# Allegro board 808bd13.brd
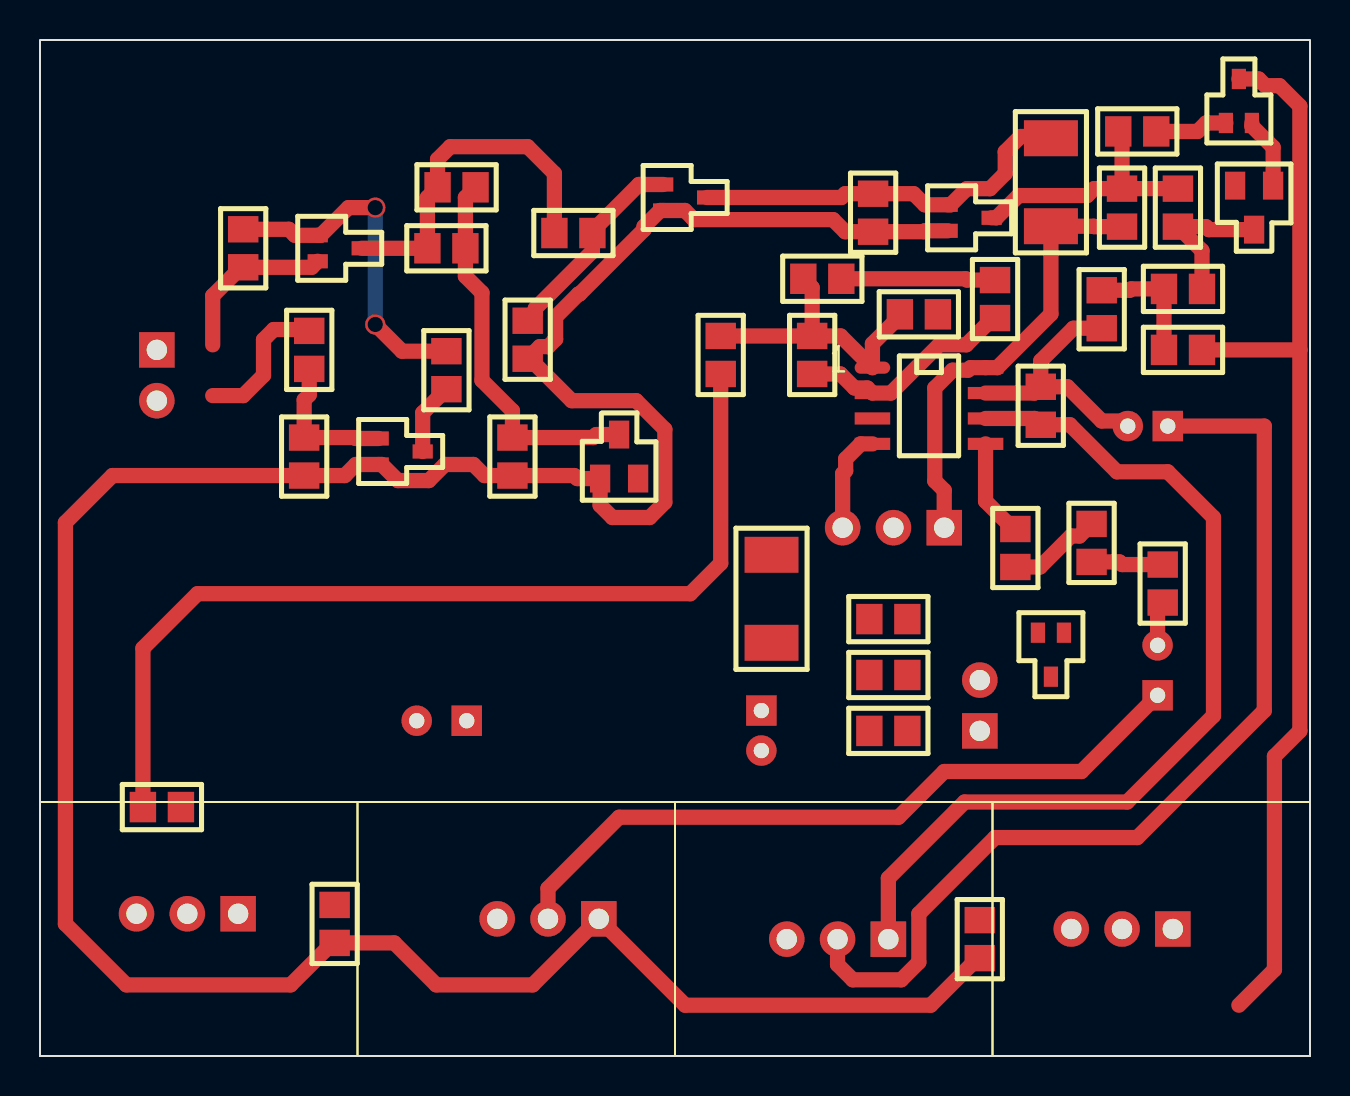
[diagram p0: board, top side]
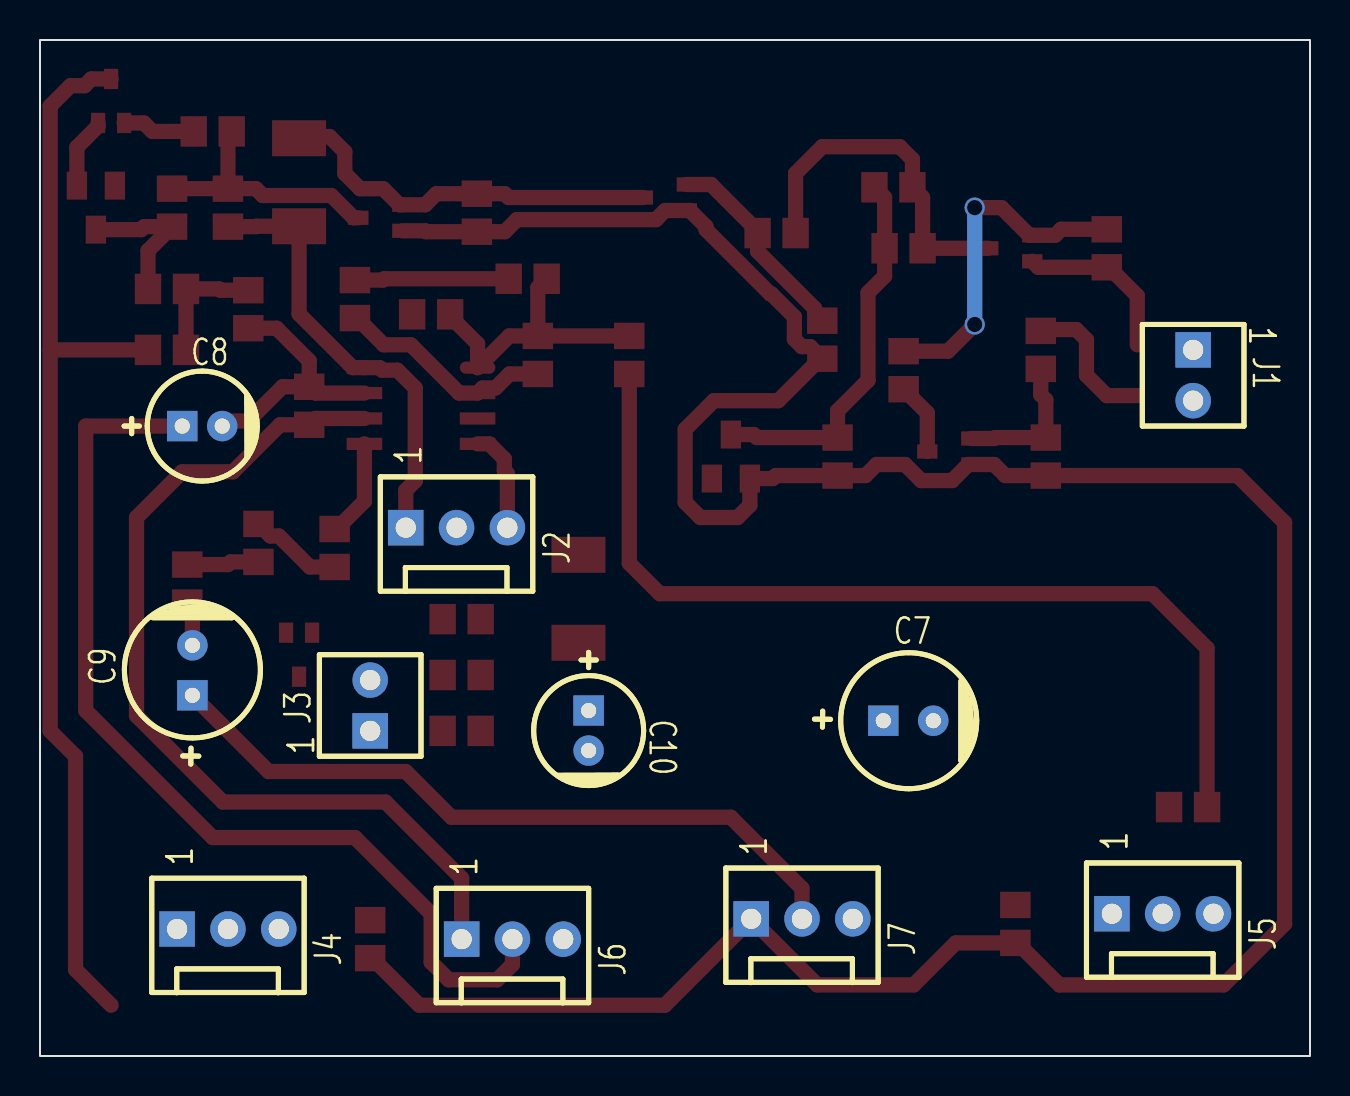
[diagram p1: board, bottom side, seen from below]

Outline 63.5 x 50.8 mm; copper layers: TOP, BOTTOM. Coordinates in mm from the lower left corner of the outline.
Outline path: rectangle 0,0 63.5,50.8

## Placement (name value [footprint] x y rotation side)
C1  0.015UF  [CAPC-0805_W]  20.83 43.43 0 top
C2  0.1UF  [CAPC-0805_W]  41.66 42.16 270 top
C3  0.033UF  [CAPC-0805_W]  56.9 42.42 270 top
C4  0.015UF  [CAPC-0805_W]  47.75 37.85 90 top
C5  0.015UF  [CAPC-0805_W]  39.12 38.86 180 top
C6  0.1UF  [CAPC-0805_W]  14.73 6.6 270 top
C7  47UF  [CAPE_2P5_6P3X11P5]  21.34 16.76 180 bottom
C8  33UF  [CAPE_2P0_5X11P5]  56.39 31.5 180 bottom
C9  47UF  [CAPE_2P5_6P3X11P5]  55.88 18.03 90 bottom
C10  1.0UF  [CAPE_2P0_5X11P5]  36.07 17.27 270 bottom
C11  220PF  [CAPC-0805_W]  42.42 21.84 0 top
D1  MMBD4148  [SOT-23_W]  28.96 29.97 90 top
D2  MMBD4148  [SOT-23_W]  60.71 42.42 270 top
J1  640452-2  [CONN-AMP-2PIN-100MIL-ST]  5.84 35.31 270 bottom
J2  640456-3  [CONN-AMP-3PIN-100MIL-ST]  45.21 26.42 180 bottom
J3  640452-2  [CONN-AMP-2PIN-100MIL-ST]  46.99 16.26 90 bottom
J4  641215-3  [CONN-AMP-3PIN-100MIL-ST]  56.64 6.35 180 bottom
J5  641215-3  [CONN-AMP-3PIN-100MIL-ST]  9.91 7.11 180 bottom
J6  641215-3  [CONN-AMP-3PIN-100MIL-ST]  42.42 5.84 180 bottom
J7  641215-3  [CONN-AMP-3PIN-100MIL-ST]  27.94 6.86 180 bottom
Q1  FJX945  [SOT-323_W]  18.03 30.23 0 top
Q2  FJX733  [SOT-323_W]  14.99 40.39 0 top
Q3  FJX945  [SOT-323_W]  32.26 42.93 0 top
Q4  FJX945  [SOT-323_W]  46.48 41.91 0 top
Q5  FJX945  [SOT-323_W]  59.94 47.75 90 top
Q6  FJX945  [SOT-323_W]  50.55 20.07 270 top
R1  22K  [RESC-0805_W]  13.46 35.31 90 top
R2  10K  [RESC-0805_W]  13.21 29.97 90 top
R3  4.7K  [RESC-0805_W]  10.16 40.39 270 top
R4  10K  [RESC-0805_W]  20.32 34.29 90 top
R5  100K  [RESC-0805_W]  20.32 40.39 0 top
R6  8.2K  [RESC-0805_W]  26.67 41.15 0 top
R7  2.7K  [RESC-0805_W]  24.38 35.81 90 top
R8  4.7K  [RESC-0805_W]  23.62 29.97 90 top
R9  1.0M  [RESC-2010_W]  50.55 43.69 270 top
R10  22K  [RESC-0805_W]  54.1 42.42 270 top
R11  100K  [RESC-0805_W]  54.86 46.23 0 top
R12  1.0M  [RESC-0805_W]  57.15 38.35 0 top
R13  6.8K  [RESC-0805_W]  57.15 35.31 180 top
R14  1.0M  [RESC-0805_W]  38.61 35.05 270 top
R16  22K  [RESC-0805_W]  46.99 5.84 90 top
R17  470K  [RESC-0805_W]  53.09 37.34 270 top
R18  10K  [RESC-0805_W]  6.1 12.45 180 top
R19  220  [RESC-0805_W]  34.04 35.05 90 top
R20  47K  [RESC-0805_W]  43.94 37.08 0 top
R22  22K  [RESC-0805_W]  48.77 25.4 90 top
R25  47K  [RESC-0805_W]  50.04 32.51 90 top
R26  82K  [RESC-0805_W]  56.13 23.62 90 top
R27  100K  [RESC-0805_W]  52.58 25.65 270 top
R28  100K  [RESC-0805_W]  42.42 19.05 180 top
R29  6.8K  [RESC-2010_W]  36.58 22.86 270 top
R30  1.0K  [RESC-0805_W]  42.42 16.26 0 top
U1  LM258D  [SO8]  44.45 32.51 0 top

## Library data of the parts
C1 C4 C5 = C_SMT_X7R_0805: alternate symbols: (CAPC-0805_W_PADS,CAPC-0805_HD); part number: C_SMT_X7R_0805-10000435,0.015UF,X7R,25V,5%,CAPC-0805_W
C2 C6 = C_SMT_X7R_0805: alternate symbols: (CAPC-0805_W_PADS,CAPC-0805_HD); part number: C_SMT_X7R_0805-10000445,0.1UF,X7R,25V,5%,CAPC-0805_W
C3 = C_SMT_X7R_0805: alternate symbols: (CAPC-0805_W_PADS,CAPC-0805_HD); part number: C_SMT_X7R_0805-10000439,0.033UF,X7R,25V,5%,CAPC-0805_W
C7 C9 = C_TH_LYTIC85_2P5_6P3X11P5: alternate symbols: (CAPE_5P0_6P3X11P5); part number: C_TH_LYTIC85_2P5_6P3X11P5-10002982,47UF,RADIAL,50VDC,20%,85C,CAPE_2P5_6P3X11P5
C8 = C_TH_LYTIC85_2P0_5X11P5: alternate symbols: (CAPE_5P0_5X11P5,CAPER_5X11_2_PADS,CAPE_2P5_5X11,CAPEL_2P0_5X11P5,CAPER_2P0_5X11P5); part number: C_TH_LYTIC85_2P0_5X11P5-10002898,33UF,RADIAL,6.3VDC,20%,85C,CAPE_2P0_5X11P5
C10 = C_TH_LYTIC85_2P0_5X11P5: alternate symbols: (CAPE_5P0_5X11P5,CAPER_5X11_2_PADS,CAPE_2P5_5X11,CAPEL_2P0_5X11P5,CAPER_2P0_5X11P5); part number: C_TH_LYTIC85_2P0_5X11P5-10002975,1.0UF,RADIAL,50VDC,20%,85C,CAPE_2P0_5X11P5
C11 = C_SMT_X7R_0805: alternate symbols: (CAPC-0805_W_PADS,CAPC-0805_HD); part number: C_SMT_X7R_0805-10000726,220PF,X7R,50V,20%,CAPC-0805_W
D1 D2 = D_SMT_SIGNAL_1A3C_SOT-23: alternate symbols: (SOT-23_IPCN,SOT-23W,SOT-23_HD); part number: D_SMT_SIGNAL_1A3C_SOT-23-10004947,MMBD4148,SIGNAL-3PIN,75V,200MA,SOT-23_W
J1 J3 = J_2_ST_AMP_640452: part number: J_2_ST_AMP_640452-10017071,640452-2,CONN-AMP-2PIN-100MIL-ST
J2 = J_3_ST_AMP_640456: part number: J_3_ST_AMP_640456-10017170,640456-3,CONN-AMP-3PIN-100MIL-ST
J4-J7 = J_3_ST_AMP_641215: part number: J_3_ST_AMP_641215-10017175,641215-3,CONN-AMP-3PIN-100MIL-ST
Q1 Q3-Q6 = Q_NPN_SIGNAL_BEC_SOT-323: alternate symbols: (SOT-323_IPCN,SOT-323_DELTA); part number: Q_NPN_SIGNAL_BEC_SOT-323-10005453,FJX945,NPN SIGNAL,50V,0.15A,SOT-323_W
Q2 = Q_PNP_SIGNAL_BEC_SOT-323: alternate symbols: (SOT-323_IPCN,SOT-323_DELTA); part number: Q_PNP_SIGNAL_BEC_SOT-323-10005646,FJX733,PNP SIGNAL,50V,0.15A,SOT-323_W
R1 R10 R16 R22 = R_SMT_0805: alternate symbols: (RESC-0805_W_PADS,RESC-0805_HD); part number: R_SMT_0805-10006498,22K,TF-SMT0805,1/8W,5%,RESC-0805_W
R2 R4 R18 = R_SMT_0805: alternate symbols: (RESC-0805_W_PADS,RESC-0805_HD); part number: R_SMT_0805-10006490,10K,TF-SMT0805,1/8W,5%,RESC-0805_W
R3 R8 = R_SMT_0805: alternate symbols: (RESC-0805_W_PADS,RESC-0805_HD); part number: R_SMT_0805-10006482,4.7K,TF-SMT0805,1/8W,5%,RESC-0805_W
R5 R11 R27 R28 = R_SMT_0805: alternate symbols: (RESC-0805_W_PADS,RESC-0805_HD); part number: R_SMT_0805-10006514,100K,TF-SMT0805,1/8W,5%,RESC-0805_W
R6 = R_SMT_0805: alternate symbols: (RESC-0805_W_PADS,RESC-0805_HD); part number: R_SMT_0805-10006488,8.2K,TF-SMT0805,1/8W,5%,RESC-0805_W
R7 = R_SMT_0805: alternate symbols: (RESC-0805_W_PADS,RESC-0805_HD); part number: R_SMT_0805-10006476,2.7K,TF-SMT0805,1/8W,5%,RESC-0805_W
R9 = R_SMT_2010: part number: R_SMT_2010-10006228,1.0M,TF-SMT2010,3/4W,5%,RESC-2010_W
R12 R14 = R_SMT_0805: alternate symbols: (RESC-0805_W_PADS,RESC-0805_HD); part number: R_SMT_0805-10006538,1.0M,TF-SMT0805,1/8W,5%,RESC-0805_W
R13 = R_SMT_0805: alternate symbols: (RESC-0805_W_PADS,RESC-0805_HD); part number: R_SMT_0805-10006486,6.8K,TF-SMT0805,1/8W,5%,RESC-0805_W
R17 = R_SMT_0805: alternate symbols: (RESC-0805_W_PADS,RESC-0805_HD); part number: R_SMT_0805-10006530,470K,TF-SMT0805,1/8W,5%,RESC-0805_W
R19 = R_SMT_0805: alternate symbols: (RESC-0805_W_PADS,RESC-0805_HD); part number: R_SMT_0805-10006450,220,TF-SMT0805,1/8W,5%,RESC-0805_W
R20 R25 = R_SMT_0805: alternate symbols: (RESC-0805_W_PADS,RESC-0805_HD); part number: R_SMT_0805-10006506,47K,TF-SMT0805,1/8W,5%,RESC-0805_W
R26 = R_SMT_0805: alternate symbols: (RESC-0805_W_PADS,RESC-0805_HD); part number: R_SMT_0805-10006512,82K,TF-SMT0805,1/8W,5%,RESC-0805_W
R29 = R_SMT_2010: part number: R_SMT_2010-10006176,6.8K,TF-SMT2010,3/4W,5%,RESC-2010_W
R30 = R_SMT_0805: alternate symbols: (RESC-0805_W_PADS,RESC-0805_HD); part number: R_SMT_0805-10006466,1.0K,TF-SMT0805,1/8W,5%,RESC-0805_W
U1 = U_LM258D_SO8: alternate symbols: (SO8_WAVE,SO8_WAVE2); part number: U_LM258D_SO8-10019370,LM258D,SO8

## Footprints (pads in the part's own frame, mm; a bottom-side part is the same pattern mirrored in y, then rotated)
CAPC-0805_W
  rect 1.321x1.524 smd: 1(-0.95,0) 2(0.95,0)
CAPE_2P0_5X11P5
  round 1.524 hole 0.762: N(2,0)
  rect 1.524x1.524 hole 0.762: P(0,0)
CAPE_2P5_6P3X11P5
  round 1.524 hole 0.762: N(2.5,0)
  rect 1.524x1.524 hole 0.762: P(0,0)
CONN-AMP-2PIN-100MIL-ST
  rect 1.778x1.778 hole 1.016: 1(0,0)
  round 1.778 hole 1.016: 2(2.54,0)
CONN-AMP-3PIN-100MIL-ST
  rect 1.778x1.778 hole 1.016: 1(0,0)
  round 1.778 hole 1.016: 2(2.54,0) 3(5.08,0)
RESC-0805_W
  rect 1.321x1.524 smd: 1(-0.95,0) 2(0.95,0)
RESC-2010_W
  rect 1.8x2.7 smd: 1(-2.2,0) 2(2.2,0)
SO8
  oval 1.778x0.61 smd: 1(-2.829,1.905)
  rect 1.778x0.61 smd: 2(-2.829,0.635) 3(-2.829,-0.635) 4(-2.829,-1.905) 5(2.829,-1.905) 6(2.829,-0.635) 7(2.829,0.635) 8(2.829,1.905)
SOT-23_W
  rect 1.397x1.016 smd: 1(-1.1,0.95) 2(-1.1,-0.95) 3(1.1,0)
SOT-323_W
  rect 1.016x0.711 smd: 1(-1.1,0.65) 2(-1.1,-0.65) 3(1.1,0)

## Nets
+15V: J2.1 Q6.3(C) R9.2 R10.2 U1.8
-15V: J2.3 R29.1 U1.4
GND_SIGNAL: C2.2 C6.2 C11.2 D1.1(A) D2.1(A) J2.2 J3.2 J7.1 Q1.2(E) Q3.2(E) Q4.2(E) Q5.2(E) R2.1 R7.1 R8.1 R16.1 R22.1 R27.1 R28.1
UNNAMED_1_CSMT_I19_1: C1.1 Q2.3(C) R5.1 R6.1
UNNAMED_1_CSMT_I19_2: C1.2 D1.3(C) R5.2 R8.2 U1.3
UNNAMED_1_CSMT_I24_1: C2.1 Q3.3(C) Q4.1(B) R9.1
UNNAMED_1_CSMT_I30_1: C3.1 Q4.3(C) R10.1 R11.1
UNNAMED_1_CSMT_I30_2: C3.2 D2.3(C) R12.2
UNNAMED_1_CSMT_I33_1: C4.1 R14.2 U1.2
UNNAMED_1_CSMT_I33_2: C4.2 C5.1 R12.1 R13.2 R17.1
UNNAMED_1_CSMT_I34_2: C5.2 R14.1 R19.2 R20.1 U1.1
UNNAMED_1_CSMT_I35_1: C10.P(1) C11.1 Q6.2(E) R29.2
UNNAMED_1_CSMT_I47_1: C6.1 C7.N(2) J5.1 J5.2 R18.1
UNNAMED_1_CTHLYTIC85_I56_1: C8.P(1) J6.2
UNNAMED_1_CTHLYTIC85_I57_1: C7.P(1) J7.3
UNNAMED_1_CTHLYTIC85_I58_2: C10.N(2) R28.2 R30.1
UNNAMED_1_CTHLYTIC85_I61_1: C9.P(1) J7.2
UNNAMED_1_CTHLYTIC85_I61_2: C9.N(2) R26.1
UNNAMED_1_J2ST_I70_1: J3.1 R30.2
UNNAMED_1_J2ST_I71_2: J1.2 R1.2
UNNAMED_1_QNPNSIGNAL_I15_B: Q1.1(B) R1.1 R2.2
UNNAMED_1_QNPNSIGNAL_I15_C: Q1.3(C) R4.1
UNNAMED_1_QNPNSIGNAL_I18_B: Q3.1(B) R6.2 R7.2
UNNAMED_1_QNPNSIGNAL_I38_B: Q5.1(B) R11.2
UNNAMED_1_QNPNSIGNAL_I38_C: J4.2 Q5.3(C) R13.1
UNNAMED_1_QNPNSIGNAL_I62_B: Q6.1(B) R26.2 R27.2
UNNAMED_1_QPNPSIGNAL_I16_B: Q2.1(B) R3.1 R4.2
UNNAMED_1_QPNPSIGNAL_I16_E: J1.1 Q2.2(E) R3.2
UNNAMED_1_RSMT_I4_2: J6.1 R20.2 R25.1 U1.6
UNNAMED_1_RSMT_I43_2: J4.3 R16.2
UNNAMED_1_RSMT_I45_1: J5.3 R18.2 R19.1
UNNAMED_1_RSMT_I52_2: C8.N(2) R17.2 R25.2 U1.7
UNNAMED_1_RSMT_I53_2: R22.2 U1.5

Pads without a net: D1 2; D2 2; J4 1; J6 3

## Via types
v1: diameter 1.016, hole 0.762, TOP to BOTTOM, 2 vias

## Routing (per net, layer and track width the routed paths; a pad name or vN(x,y) marks a point on that pad's centre or on a via; arc(x,y) is an arc through that point)
+15V: length 22.5
  TOP w0.762: R10.2 52.71,41.47 52.68,41.49 R9.2 50.55,37.1 47.86,34.42 U1.8 46.52,34.42 46.39,34.29 45.63,34.29 44.74,33.4 44.74,28.75 45.21,28.28 J2.1
-15V: length 5.2
  TOP w0.762: U1.4 41.04,30.61 40.28,29.85 40.28,29.27 40.13,29.12 J2.3
GND_SIGNAL: length 152.5
  TOP w0.762: R22.1 50,24.45 51.55,26 51.97,26 R27.1 ; D2.1 61.66,45.44 60.59,46.5 Q5.2 ; R16.1 46.89,4.89 44.54,2.54 32.26,2.54 J7.1 24.64,3.56 19.81,3.56 17.71,5.65 C6.2 14.63,5.65 12.53,3.56 4.32,3.56 1.27,6.6 1.27,26.67 3.62,29.02 R2.1 15.24,29.02 15.79,29.58 Q1.2 17.09,29.58 17.89,28.77 19.44,28.77 20.25,29.58 21.67,29.58 22.23,29.02 R8.1 26.71,29.02 26.86,28.87 D1.1 28.01,27.54 28.62,26.92 30.48,26.92 31.24,27.69 31.24,31.33 29.81,32.77 26.58,32.77 24.49,34.86 R7.1 24.99,35.47 25.41,35.47 25.78,35.84 25.78,36.96 26.92,38.1 26.98,38.1 30.2,41.32 30.2,41.47 31.01,42.28 Q3.2 32.25,42.28 32.7,41.82 39.65,41.82 40.26,41.21 C2.2 44.19,41.21 44.24,41.26 Q4.2
UNNAMED_1_CSMT_I19_1: length 17.6
  TOP w0.762: Q2.3 R5.1 19.37,42.93 C1.1 19.88,44.83 20.51,45.47 24.38,45.47 25.72,44.13 R6.1
UNNAMED_1_CSMT_I19_2: length 19.1
  TOP w0.762: D1.3 27.81,31.07 27.66,30.92 R8.2 23.62,32.26 22.1,33.78 22.1,38.16 21.27,38.99 R5.2 21.27,42.93 C1.2
UNNAMED_1_CSMT_I24_1: length 19.6
  TOP w0.762: Q3.3 40.07,42.93 40.26,43.11 C2.1 43.69,43.11 44.24,42.56 Q4.1 45.53,42.56 46.34,43.36 47.5,43.36 48.26,44.13 48.26,45.21 49.02,45.97 50.46,45.97 R9.1
UNNAMED_1_CSMT_I30_1: length 12.9
  TOP w0.762: R10.1 54.1,46.04 R11.1 ; R10.1 C3.1 ; R10.1 52.71,43.37 52.36,43.02 48.93,43.02 47.82,41.91 Q4.3
UNNAMED_1_CSMT_I30_2: length 7.5
  TOP w0.762: D2.3 58.44,41.32 58.29,41.47 C3.2 58.1,40.26 R12.2
UNNAMED_1_CSMT_I33_1: length 11.1
  TOP w0.762: R14.2 40.02,34.1 40.72,33.4 41.37,33.4 U1.2 42.55,33.15 44.96,35.56 46.31,35.56 47.65,36.9 C4.1
UNNAMED_1_CSMT_I33_2: length 13.9
  TOP w0.762: R17.1 54.48,38.29 54.55,38.35 R12.1 R13.2 ; C5.1 46.29,38.86 46.36,38.8 C4.2
UNNAMED_1_CSMT_I34_2: length 14.5
  TOP w0.762: C5.2 38.61,38.42 R14.1 ; R14.1 R19.2 ; R14.1 40.04,36 U1.1 41.62,35.61 42.99,36.98 R20.1
UNNAMED_1_CTHLYTIC85_I56_1: length 49
  TOP w0.762: C8.P 61.21,31.5 61.21,17.27 54.86,10.92 47.75,10.92 43.94,7.11 43.94,4.69 43.06,3.81 40.64,3.81 39.88,4.57 J6.2
UNNAMED_1_CTHLYTIC85_I61_1: length 36
  TOP w0.762: C9.P 52.07,14.22 45.21,14.22 42.93,11.94 28.96,11.94 25.4,8.38 J7.2
UNNAMED_1_CTHLYTIC85_I61_2: length 2.2
  TOP w0.762: R26.1 55.88,22.42 C9.N
UNNAMED_1_J2ST_I71_2: length 7.3
  TOP w0.762: R1.2 13.4,36.32 11.68,36.32 11.18,35.81 11.18,34.04 10.16,33.02 8.64,33.02
UNNAMED_1_QNPNSIGNAL_I15_B: length 7.3
  TOP w0.762: R1.1 13.46,33.06 13.21,32.81 R2.2 15.75,30.92 15.79,30.88 Q1.1
UNNAMED_1_QNPNSIGNAL_I15_C: length 3.6
  TOP w0.762: R4.1 19.13,32.15 Q1.3
UNNAMED_1_QNPNSIGNAL_I18_B: length 10.3
  TOP w0.762: Q3.1 29.95,43.58 27.62,41.25 R6.2 27.62,40.23 24.77,37.38 24.77,37.14 R7.2
UNNAMED_1_QNPNSIGNAL_I38_B: length 3.7
  TOP w0.762: Q5.1 58.3,46.65 57.88,46.23 R11.2
UNNAMED_1_QNPNSIGNAL_I38_C: length 54.7
  TOP w0.762: R13.1 62.99,35.31 ; 62.99,35.31 62.99,16.26 61.72,14.99 61.72,4.32 59.94,2.54 ; 62.99,35.31 62.99,47.5 61.98,48.51 61.27,48.51 60.93,48.85 Q5.3
UNNAMED_1_QNPNSIGNAL_I62_B: length 3.6
  TOP w0.762: R26.2 54.11,24.57 53.98,24.7 R27.2
UNNAMED_1_QPNPSIGNAL_I16_B: length 17.3
  TOP w0.762: v1(16.76,42.42) 15.42,42.42 14.04,41.04 Q2.1 12.74,41.04 12.44,41.34 R3.1 ; R4.2 18.1,35.24 v1(16.76,36.58)
  BOTTOM w0.762: v1(16.76,36.58) v1(16.76,42.42)
UNNAMED_1_QPNPSIGNAL_I16_E: length 8.4
  TOP w0.762: Q2.2 13.59,39.44 R3.2 10.06,39.44 8.64,38.01 8.64,35.56
UNNAMED_1_RSMT_I4_2: length 46
  TOP w0.762: U1.6 49.72,31.88 R25.1 51.5,31.56 53.85,29.21 56.39,29.21 58.67,26.92 58.67,17.02 54.36,12.7 46.23,12.7 42.42,8.89 J6.1
UNNAMED_1_RSMT_I45_1: length 48.1
  TOP w0.762: R18.2 5.15,20.39 7.87,23.11 32.51,23.11 34.04,24.64 R19.1
UNNAMED_1_RSMT_I52_2: length 13.1
  TOP w0.762: R25.2 49.72,33.15 U1.7 ; R25.2 51.37,33.46 53.09,31.75 54.13,31.75 C8.N ; R25.2 50.04,34.76 51.67,36.39 R17.2
UNNAMED_1_RSMT_I53_2: length 4.9
  TOP w0.762: U1.5 47.28,27.74 48.67,26.35 R22.2
